# Altium PCB Pedal_WS2812.PcbDoc
Units mm, origin at the board's own origin, x right, y up, seen from the top; angles counter-clockwise.
Board outline 57 x 58 mm, 2 copper layers (Top Layer, Bottom Layer), stack 0.791 mm thick; 81 components, 0 nets, 334 pads, 0 vias.
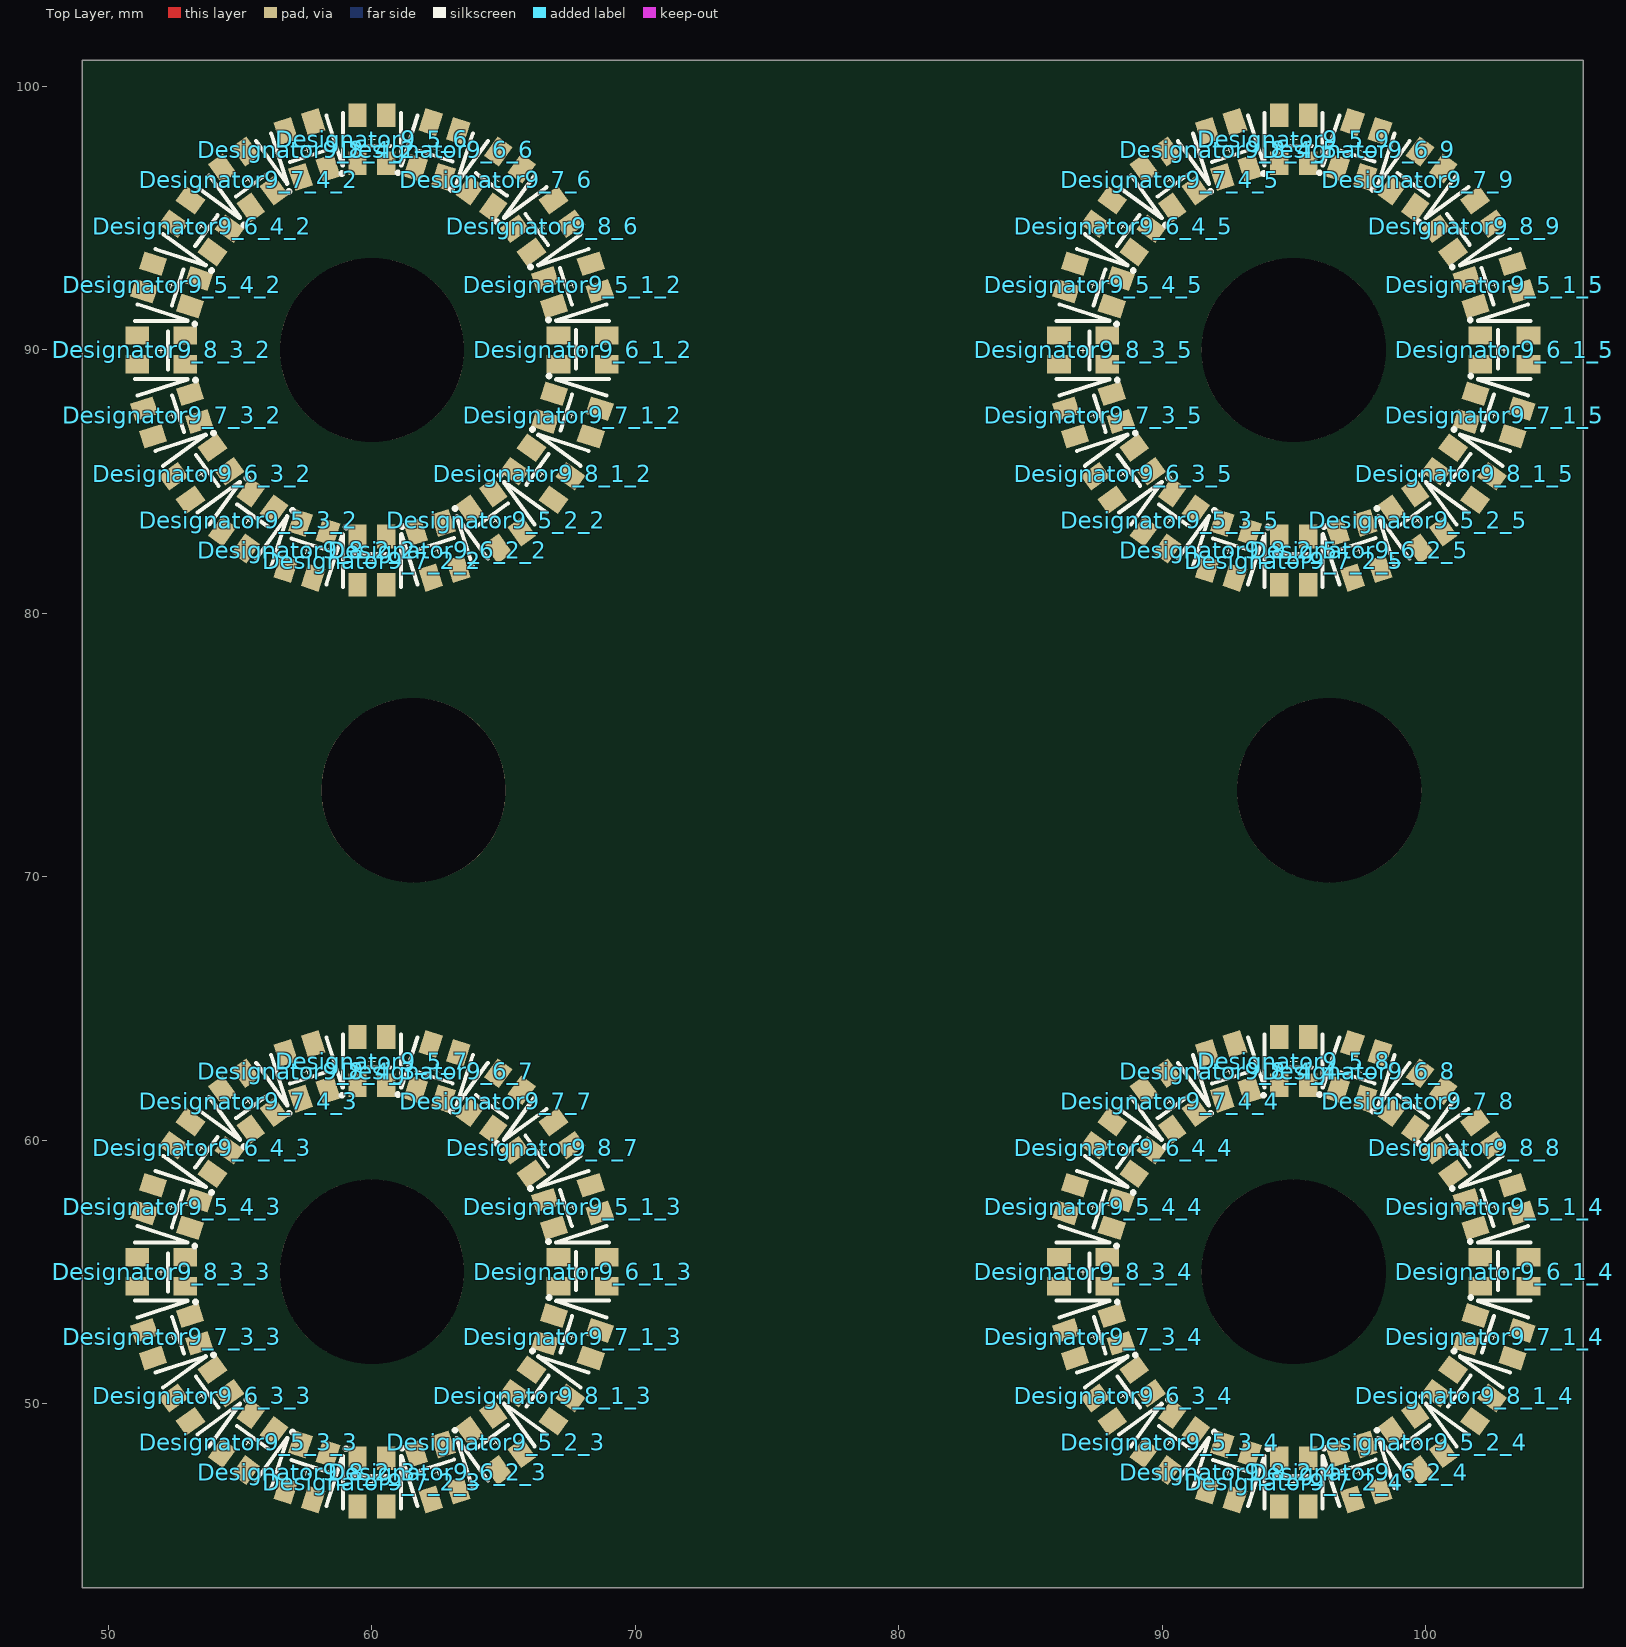
[diagram p0: Top Layer view]
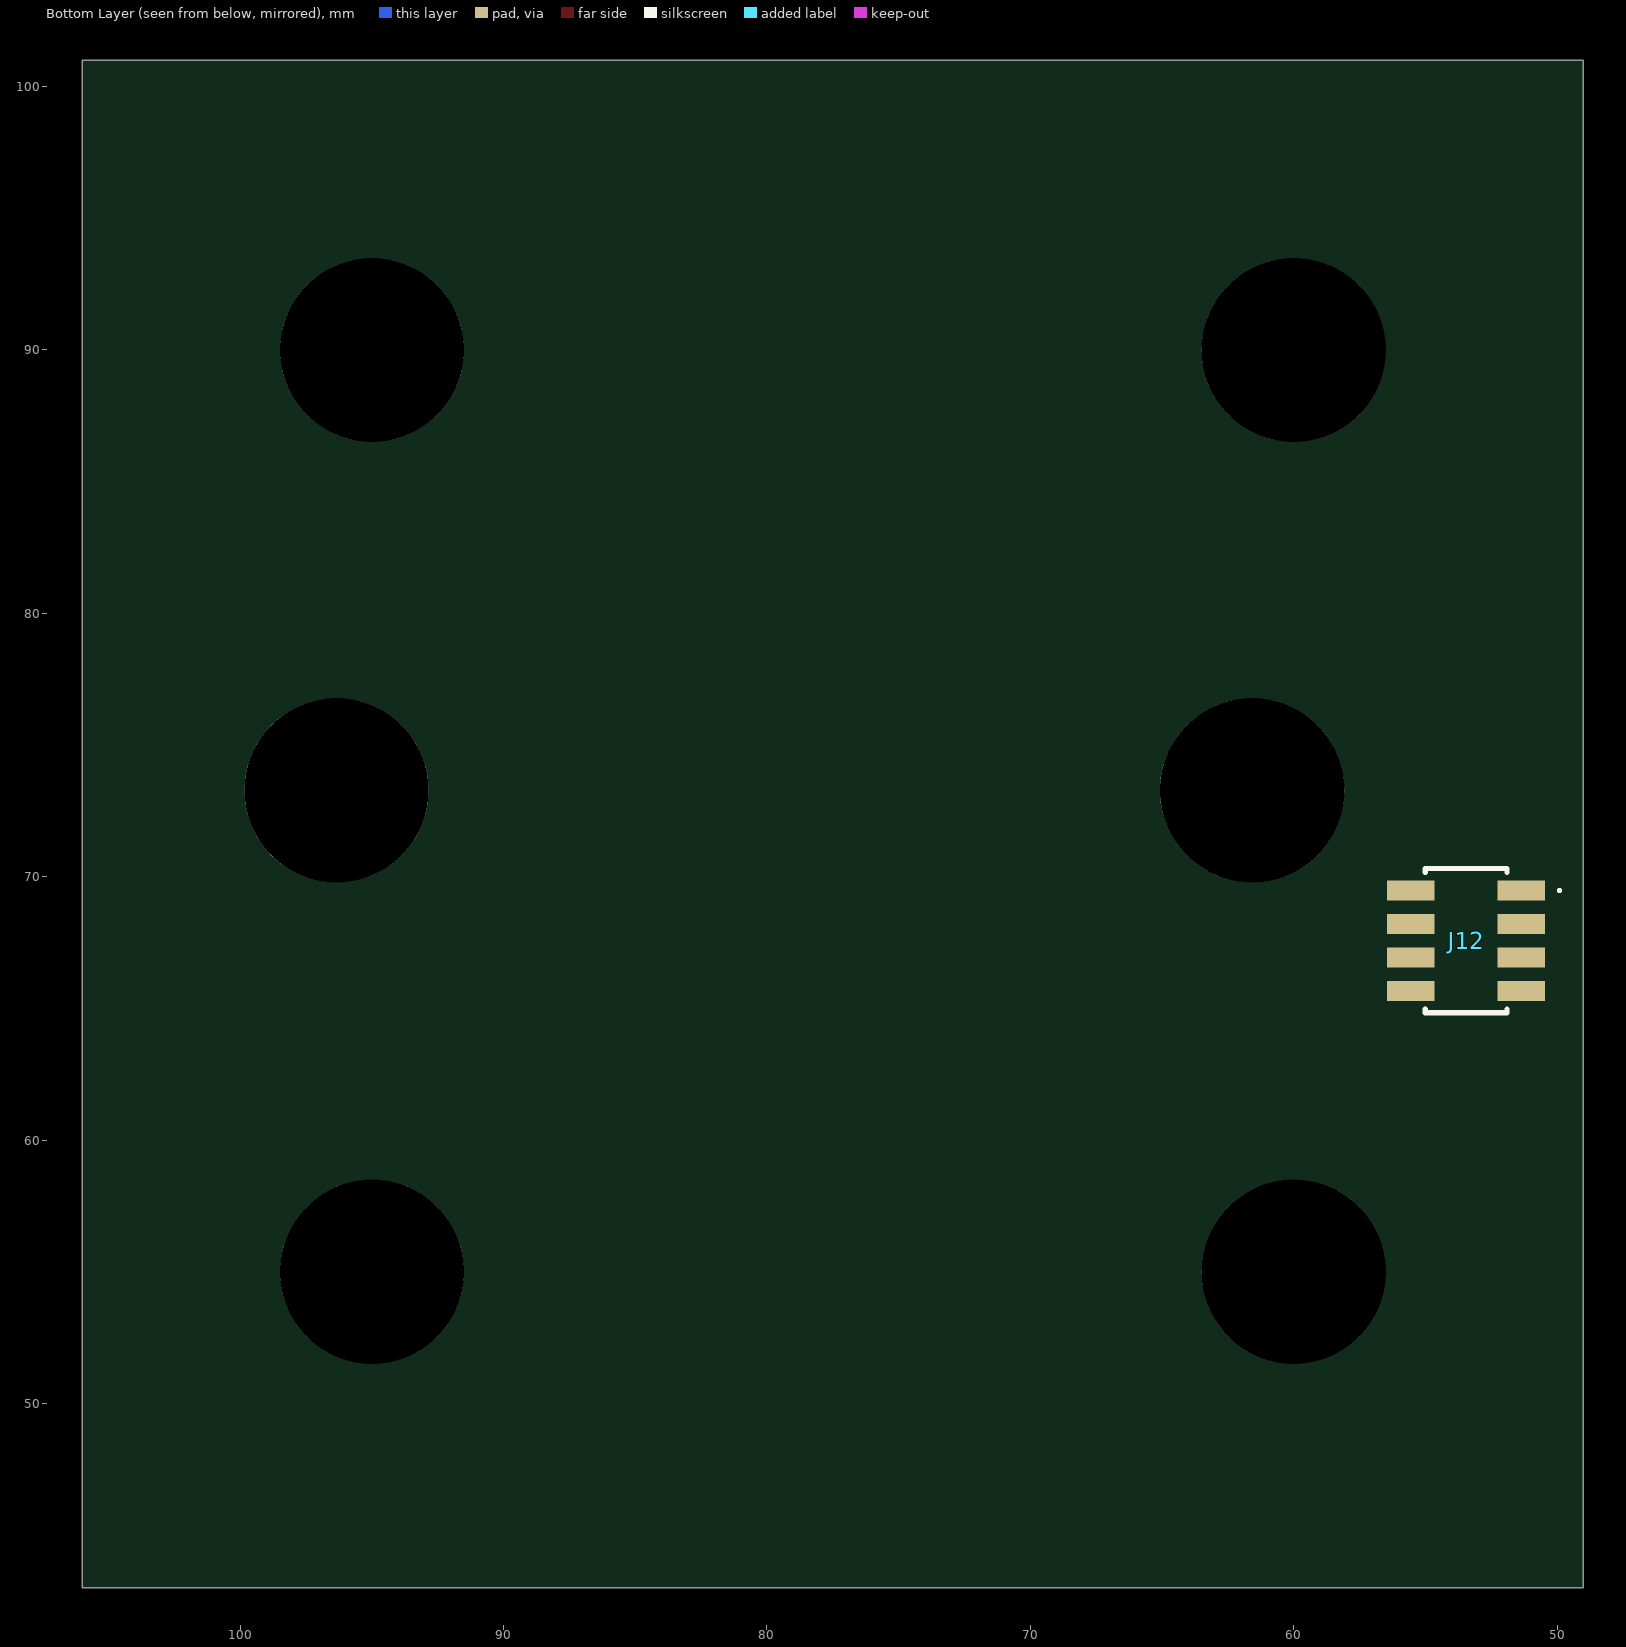
[diagram p1: Bottom Layer view, seen from below]

## Layer stack, top to bottom
Top Solder: solder mask 0.0102, Solder Resist, Dk 3.5
Top Layer: signal copper 0.0356
Dielectric 1: dielectric 0.72, FR-4, Dk 4.8
Bottom Layer: signal copper 0.0356
Bottom Solder: solder mask 0.0102, Solder Resist, Dk 3.5

## Board outline
49,43 49,101 106,101 106,43

## Design rules (kind name [scope] priority, off if disabled: settings)
Clearance [All] p1: gap=0.254 ignorepadtopadclearanceinfootprint=FALSE
PolygonConnect [All] p1: connectstyle=Relief reliefconductorwidth=0.254 reliefentries=4 polygonreliefangle="90 Angle" airgapwidth=0.254
RoutingVias [All] p1: holewidth=0.711 width=1.27 viastyle="Through Hole" minholewidth=0.711 minwidth=1.27 maxholewidth=0.711 maxwidth=1.27
SolderMaskExpansion [All] p1: expansion=0.102 istentingtop=FALSE
Width [All] p1: maxlimit=0.254 minlimit=0.254 preferedwidth=0.254
30 further rules are at their usual default settings.

## Components (designator, comment, footprint, x,y, rotation, side; value= is the part's Value field where it differs from the comment)
Designator9_5_1_2 "Comment" WS2812_2020 67.608,92.472 r18 top
Designator9_5_1_3 "Comment" WS2812_2020 67.608,57.472 r18 top
Designator9_5_1_4 "Comment" WS2812_2020 102.608,57.472 r18 top
Designator9_5_1_5 "Comment" WS2812_2020 102.608,92.472 r18 top
Designator9_5_2_2 "Comment" WS2812_2020 64.702,83.528 r306 top
Designator9_5_2_3 "Comment" WS2812_2020 64.702,48.528 r306 top
Designator9_5_2_4 "Comment" WS2812_2020 99.702,48.528 r306 top
Designator9_5_2_5 "Comment" WS2812_2020 99.702,83.528 r306 top
Designator9_5_3_2 "Comment" WS2812_2020 55.298,83.528 r234 top
Designator9_5_3_3 "Comment" WS2812_2020 55.298,48.528 r234 top
Designator9_5_3_4 "Comment" WS2812_2020 90.298,48.528 r234 top
Designator9_5_3_5 "Comment" WS2812_2020 90.298,83.528 r234 top
Designator9_5_4_2 "Comment" WS2812_2020 52.392,92.472 r162 top
Designator9_5_4_3 "Comment" WS2812_2020 52.392,57.472 r162 top
Designator9_5_4_4 "Comment" WS2812_2020 87.392,57.472 r162 top
Designator9_5_4_5 "Comment" WS2812_2020 87.392,92.472 r162 top
Designator9_5_6 "Comment" WS2812_2020 60,98 r90 top
Designator9_5_7 "Comment" WS2812_2020 60,63 r90 top
Designator9_5_8 "Comment" WS2812_2020 95,63 r90 top
Designator9_5_9 "Comment" WS2812_2020 95,98 r90 top
Designator9_6_1_2 "Comment" WS2812_2020 68,90 r0 top
Designator9_6_1_3 "Comment" WS2812_2020 68,55 r0 top
Designator9_6_1_4 "Comment" WS2812_2020 103,55 r0 top
Designator9_6_1_5 "Comment" WS2812_2020 103,90 r0 top
Designator9_6_2_2 "Comment" WS2812_2020 62.472,82.392 r288 top
Designator9_6_2_3 "Comment" WS2812_2020 62.472,47.392 r288 top
Designator9_6_2_4 "Comment" WS2812_2020 97.472,47.392 r288 top
Designator9_6_2_5 "Comment" WS2812_2020 97.472,82.392 r288 top
Designator9_6_3_2 "Comment" WS2812_2020 53.528,85.298 r216 top
Designator9_6_3_3 "Comment" WS2812_2020 53.528,50.298 r216 top
Designator9_6_3_4 "Comment" WS2812_2020 88.528,50.298 r216 top
Designator9_6_3_5 "Comment" WS2812_2020 88.528,85.298 r216 top
Designator9_6_4_2 "Comment" WS2812_2020 53.528,94.702 r144 top
Designator9_6_4_3 "Comment" WS2812_2020 53.528,59.702 r144 top
Designator9_6_4_4 "Comment" WS2812_2020 88.528,59.702 r144 top
Designator9_6_4_5 "Comment" WS2812_2020 88.528,94.702 r144 top
Designator9_6_6 "Comment" WS2812_2020 62.472,97.608 r72 top
Designator9_6_7 "Comment" WS2812_2020 62.472,62.608 r72 top
Designator9_6_8 "Comment" WS2812_2020 97.472,62.608 r72 top
Designator9_6_9 "Comment" WS2812_2020 97.472,97.608 r72 top
Designator9_7_1_2 "Comment" WS2812_2020 67.608,87.528 r342 top
Designator9_7_1_3 "Comment" WS2812_2020 67.608,52.528 r342 top
Designator9_7_1_4 "Comment" WS2812_2020 102.608,52.528 r342 top
Designator9_7_1_5 "Comment" WS2812_2020 102.608,87.528 r342 top
Designator9_7_2_2 "Comment" WS2812_2020 60,82 r270 top
Designator9_7_2_3 "Comment" WS2812_2020 60,47 r270 top
Designator9_7_2_4 "Comment" WS2812_2020 95,47 r270 top
Designator9_7_2_5 "Comment" WS2812_2020 95,82 r270 top
Designator9_7_3_2 "Comment" WS2812_2020 52.392,87.528 r198 top
Designator9_7_3_3 "Comment" WS2812_2020 52.392,52.528 r198 top
Designator9_7_3_4 "Comment" WS2812_2020 87.392,52.528 r198 top
Designator9_7_3_5 "Comment" WS2812_2020 87.392,87.528 r198 top
Designator9_7_4_2 "Comment" WS2812_2020 55.298,96.472 r126 top
Designator9_7_4_3 "Comment" WS2812_2020 55.298,61.472 r126 top
Designator9_7_4_4 "Comment" WS2812_2020 90.298,61.472 r126 top
Designator9_7_4_5 "Comment" WS2812_2020 90.298,96.472 r126 top
Designator9_7_6 "Comment" WS2812_2020 64.702,96.472 r54 top
Designator9_7_7 "Comment" WS2812_2020 64.702,61.472 r54 top
Designator9_7_8 "Comment" WS2812_2020 99.702,61.472 r54 top
Designator9_7_9 "Comment" WS2812_2020 99.702,96.472 r54 top
Designator9_8_1_2 "Comment" WS2812_2020 66.472,85.298 r324 top
Designator9_8_1_3 "Comment" WS2812_2020 66.472,50.298 r324 top
Designator9_8_1_4 "Comment" WS2812_2020 101.472,50.298 r324 top
Designator9_8_1_5 "Comment" WS2812_2020 101.472,85.298 r324 top
Designator9_8_2_2 "Comment" WS2812_2020 57.528,82.392 r252 top
Designator9_8_2_3 "Comment" WS2812_2020 57.528,47.392 r252 top
Designator9_8_2_4 "Comment" WS2812_2020 92.528,47.392 r252 top
Designator9_8_2_5 "Comment" WS2812_2020 92.528,82.392 r252 top
Designator9_8_3_2 "Comment" WS2812_2020 52,90 r180 top
Designator9_8_3_3 "Comment" WS2812_2020 52,55 r180 top
Designator9_8_3_4 "Comment" WS2812_2020 87,55 r180 top
Designator9_8_3_5 "Comment" WS2812_2020 87,90 r180 top
Designator9_8_4_2 "Comment" WS2812_2020 57.528,97.608 r108 top
Designator9_8_4_3 "Comment" WS2812_2020 57.528,62.608 r108 top
Designator9_8_4_4 "Comment" WS2812_2020 92.528,62.608 r108 top
Designator9_8_4_5 "Comment" WS2812_2020 92.528,97.608 r108 top
Designator9_8_6 "Comment" WS2812_2020 66.472,94.702 r36 top
Designator9_8_7 "Comment" WS2812_2020 66.472,59.702 r36 top
Designator9_8_8 "Comment" WS2812_2020 101.472,59.702 r36 top
Designator9_8_9 "Comment" WS2812_2020 101.472,94.702 r36 top
J12 "LPPB042NFSS-RC" LPPB042NFSSRC 53.453,67.572 r270 bottom (schematic designator J1)

## Footprints (in the part's own frame and the unit in brackets; to place one, negate y for a bottom-side part, rotate by r counter-clockwise, add the part's x,y. Pads: shape width x height; smd on the part's side, far side on the other; paste and mask are expansions set on the pad)
LPPB042NFSSRC [mm]
  rect 0.76x1.8 smd: 1(-1.905,2.1) 2(-1.905,-2.1) 3(-0.635,2.1) 4(-0.635,-2.1) 5(0.635,2.1) 6(0.635,-2.1) 7(1.905,2.1) 8(1.905,-2.1)
  silkscreen extent -2.74,-1.55 2.74,3.6, body extent -2.74,-2.92 2.74,2.92, height 4.75
WS2812_2020 [mm]
  rect 0.9x0.7 smd: 1(-0.915,0.55) 2(-0.915,-0.55) 3(0.915,-0.55) 4(0.915,0.55)
  silkscreen extent -1.3,-1.1 1,1.15, body extent -1.09,-0.98 1.11,1.02, height 0.86

## Part data
J12: "Connector", Manufacturer_Name=Sullins, Datasheet Link=https://www.sullinscorp.com/drawings/88_LPPB___2NFSS-RC,_11017.pdf, Height=4.65mm, Manufacturer_Part_Number=LPPB042NFSS-RC

## Free pads (board coordinates)
  round 7 hole 7 unplated: 0(61.579,73.284) 0(96.349,73.284)
  round 6.985 hole 7 mask+0.06: NC(60,55) NC(60,90) NC(95,90) NC(95,55)

## Nets (pads, with @x,y where several pads share a name; then routed paths per layer and width w, separated by ;. In a path a pad name is that pad's centre, name@x,y a point inside that pad or via, vN(x,y) a via of type N, cw(c..) or ccw(c..) an arc to the next point about the centre after c; other vN are vias at no path point)
pads on no net: Designator9_5_1_2.1 Designator9_5_1_2.2 Designator9_5_1_2.3 Designator9_5_1_2.4 Designator9_5_1_3.1 Designator9_5_1_3.2 Designator9_5_1_3.3 Designator9_5_1_3.4 Designator9_5_1_4.1 Designator9_5_1_4.2 Designator9_5_1_4.3 Designator9_5_1_4.4 Designator9_5_1_5.1 Designator9_5_1_5.2 Designator9_5_1_5.3 Designator9_5_1_5.4 Designator9_5_2_2.1 Designator9_5_2_2.2 Designator9_5_2_2.3 Designator9_5_2_2.4 Designator9_5_2_3.1 Designator9_5_2_3.2 Designator9_5_2_3.3 Designator9_5_2_3.4 Designator9_5_2_4.1 Designator9_5_2_4.2 Designator9_5_2_4.3 Designator9_5_2_4.4 Designator9_5_2_5.1 Designator9_5_2_5.2 Designator9_5_2_5.3 Designator9_5_2_5.4 Designator9_5_3_2.1 Designator9_5_3_2.2 Designator9_5_3_2.3 Designator9_5_3_2.4 Designator9_5_3_3.1 Designator9_5_3_3.2 Designator9_5_3_3.3 Designator9_5_3_3.4 Designator9_5_3_4.1 Designator9_5_3_4.2 Designator9_5_3_4.3 Designator9_5_3_4.4 Designator9_5_3_5.1 Designator9_5_3_5.2 Designator9_5_3_5.3 Designator9_5_3_5.4 Designator9_5_4_2.1 Designator9_5_4_2.2 Designator9_5_4_2.3 Designator9_5_4_2.4 Designator9_5_4_3.1 Designator9_5_4_3.2 Designator9_5_4_3.3 Designator9_5_4_3.4 Designator9_5_4_4.1 Designator9_5_4_4.2 Designator9_5_4_4.3 Designator9_5_4_4.4 Designator9_5_4_5.1 Designator9_5_4_5.2 Designator9_5_4_5.3 Designator9_5_4_5.4 Designator9_5_6.1 Designator9_5_6.2 Designator9_5_6.3 Designator9_5_6.4 Designator9_5_7.1 Designator9_5_7.2 Designator9_5_7.3 Designator9_5_7.4 Designator9_5_8.1 Designator9_5_8.2 Designator9_5_8.3 Designator9_5_8.4 Designator9_5_9.1 Designator9_5_9.2 Designator9_5_9.3 Designator9_5_9.4 Designator9_6_1_2.1 Designator9_6_1_2.2 Designator9_6_1_2.3 Designator9_6_1_2.4 Designator9_6_1_3.1 Designator9_6_1_3.2 Designator9_6_1_3.3 Designator9_6_1_3.4 Designator9_6_1_4.1 Designator9_6_1_4.2 Designator9_6_1_4.3 Designator9_6_1_4.4 Designator9_6_1_5.1 Designator9_6_1_5.2 Designator9_6_1_5.3 Designator9_6_1_5.4 Designator9_6_2_2.1 Designator9_6_2_2.2 Designator9_6_2_2.3 Designator9_6_2_2.4 Designator9_6_2_3.1 Designator9_6_2_3.2 Designator9_6_2_3.3 Designator9_6_2_3.4 Designator9_6_2_4.1 Designator9_6_2_4.2 Designator9_6_2_4.3 Designator9_6_2_4.4 Designator9_6_2_5.1 Designator9_6_2_5.2 Designator9_6_2_5.3 Designator9_6_2_5.4 Designator9_6_3_2.1 Designator9_6_3_2.2 Designator9_6_3_2.3 Designator9_6_3_2.4 Designator9_6_3_3.1 Designator9_6_3_3.2 Designator9_6_3_3.3 Designator9_6_3_3.4 Designator9_6_3_4.1 Designator9_6_3_4.2 Designator9_6_3_4.3 Designator9_6_3_4.4 Designator9_6_3_5.1 Designator9_6_3_5.2 Designator9_6_3_5.3 Designator9_6_3_5.4 Designator9_6_4_2.1 Designator9_6_4_2.2 Designator9_6_4_2.3 Designator9_6_4_2.4 Designator9_6_4_3.1 Designator9_6_4_3.2 Designator9_6_4_3.3 Designator9_6_4_3.4 Designator9_6_4_4.1 Designator9_6_4_4.2 Designator9_6_4_4.3 Designator9_6_4_4.4 Designator9_6_4_5.1 Designator9_6_4_5.2 Designator9_6_4_5.3 Designator9_6_4_5.4 Designator9_6_6.1 Designator9_6_6.2 Designator9_6_6.3 Designator9_6_6.4 Designator9_6_7.1 Designator9_6_7.2 Designator9_6_7.3 Designator9_6_7.4 Designator9_6_8.1 Designator9_6_8.2 Designator9_6_8.3 Designator9_6_8.4 Designator9_6_9.1 Designator9_6_9.2 Designator9_6_9.3 Designator9_6_9.4 Designator9_7_1_2.1 Designator9_7_1_2.2 Designator9_7_1_2.3 Designator9_7_1_2.4 Designator9_7_1_3.1 Designator9_7_1_3.2 Designator9_7_1_3.3 Designator9_7_1_3.4 Designator9_7_1_4.1 Designator9_7_1_4.2 Designator9_7_1_4.3 Designator9_7_1_4.4 Designator9_7_1_5.1 Designator9_7_1_5.2 Designator9_7_1_5.3 Designator9_7_1_5.4 Designator9_7_2_2.1 Designator9_7_2_2.2 Designator9_7_2_2.3 Designator9_7_2_2.4 Designator9_7_2_3.1 Designator9_7_2_3.2 Designator9_7_2_3.3 Designator9_7_2_3.4 Designator9_7_2_4.1 Designator9_7_2_4.2 Designator9_7_2_4.3 Designator9_7_2_4.4 Designator9_7_2_5.1 Designator9_7_2_5.2 Designator9_7_2_5.3 Designator9_7_2_5.4 Designator9_7_3_2.1 Designator9_7_3_2.2 Designator9_7_3_2.3 Designator9_7_3_2.4 Designator9_7_3_3.1 Designator9_7_3_3.2 Designator9_7_3_3.3 Designator9_7_3_3.4 Designator9_7_3_4.1 Designator9_7_3_4.2 Designator9_7_3_4.3 Designator9_7_3_4.4 Designator9_7_3_5.1 Designator9_7_3_5.2 Designator9_7_3_5.3 Designator9_7_3_5.4 Designator9_7_4_2.1 Designator9_7_4_2.2 Designator9_7_4_2.3 Designator9_7_4_2.4 Designator9_7_4_3.1 Designator9_7_4_3.2 Designator9_7_4_3.3 Designator9_7_4_3.4 Designator9_7_4_4.1 Designator9_7_4_4.2 Designator9_7_4_4.3 Designator9_7_4_4.4 Designator9_7_4_5.1 Designator9_7_4_5.2 Designator9_7_4_5.3 Designator9_7_4_5.4 Designator9_7_6.1 Designator9_7_6.2 Designator9_7_6.3 Designator9_7_6.4 Designator9_7_7.1 Designator9_7_7.2 Designator9_7_7.3 Designator9_7_7.4 Designator9_7_8.1 Designator9_7_8.2 Designator9_7_8.3 Designator9_7_8.4 Designator9_7_9.1 Designator9_7_9.2 Designator9_7_9.3 Designator9_7_9.4 Designator9_8_1_2.1 Designator9_8_1_2.2 Designator9_8_1_2.3 Designator9_8_1_2.4 Designator9_8_1_3.1 Designator9_8_1_3.2 Designator9_8_1_3.3 Designator9_8_1_3.4 Designator9_8_1_4.1 Designator9_8_1_4.2 Designator9_8_1_4.3 Designator9_8_1_4.4 Designator9_8_1_5.1 Designator9_8_1_5.2 Designator9_8_1_5.3 Designator9_8_1_5.4 Designator9_8_2_2.1 Designator9_8_2_2.2 Designator9_8_2_2.3 Designator9_8_2_2.4 Designator9_8_2_3.1 Designator9_8_2_3.2 Designator9_8_2_3.3 Designator9_8_2_3.4 Designator9_8_2_4.1 Designator9_8_2_4.2 Designator9_8_2_4.3 Designator9_8_2_4.4 Designator9_8_2_5.1 Designator9_8_2_5.2 Designator9_8_2_5.3 Designator9_8_2_5.4 Designator9_8_3_2.1 Designator9_8_3_2.2 Designator9_8_3_2.3 Designator9_8_3_2.4 Designator9_8_3_3.1 Designator9_8_3_3.2 Designator9_8_3_3.3 Designator9_8_3_3.4 Designator9_8_3_4.1 Designator9_8_3_4.2 Designator9_8_3_4.3 Designator9_8_3_4.4 Designator9_8_3_5.1 Designator9_8_3_5.2 Designator9_8_3_5.3 Designator9_8_3_5.4 Designator9_8_4_2.1 Designator9_8_4_2.2 Designator9_8_4_2.3 Designator9_8_4_2.4 Designator9_8_4_3.1 Designator9_8_4_3.2 Designator9_8_4_3.3 Designator9_8_4_3.4 Designator9_8_4_4.1 Designator9_8_4_4.2 Designator9_8_4_4.3 Designator9_8_4_4.4 Designator9_8_4_5.1 Designator9_8_4_5.2 Designator9_8_4_5.3 Designator9_8_4_5.4 Designator9_8_6.1 Designator9_8_6.2 Designator9_8_6.3 Designator9_8_6.4 Designator9_8_7.1 Designator9_8_7.2 Designator9_8_7.3 Designator9_8_7.4 Designator9_8_8.1 Designator9_8_8.2 Designator9_8_8.3 Designator9_8_8.4 Designator9_8_9.1 Designator9_8_9.2 Designator9_8_9.3 Designator9_8_9.4 J12.1 J12.2 J12.3 J12.4 J12.5 J12.6 J12.7 J12.8

## Silkscreen, mask and mechanical layers (free items; w line width, h text height)
Board Shape:
  circle w0.254: c95,90 r1.5
  circle w0.254: c95,55 r1.5
  circle w0.254: c60,55 r1.5
  circle w0.254: c60,90 r1.5
  lines w0.025: 49,43 49,101 106,101 106,43 49,43